# Allegro board QTPLUS_V2_1.brd
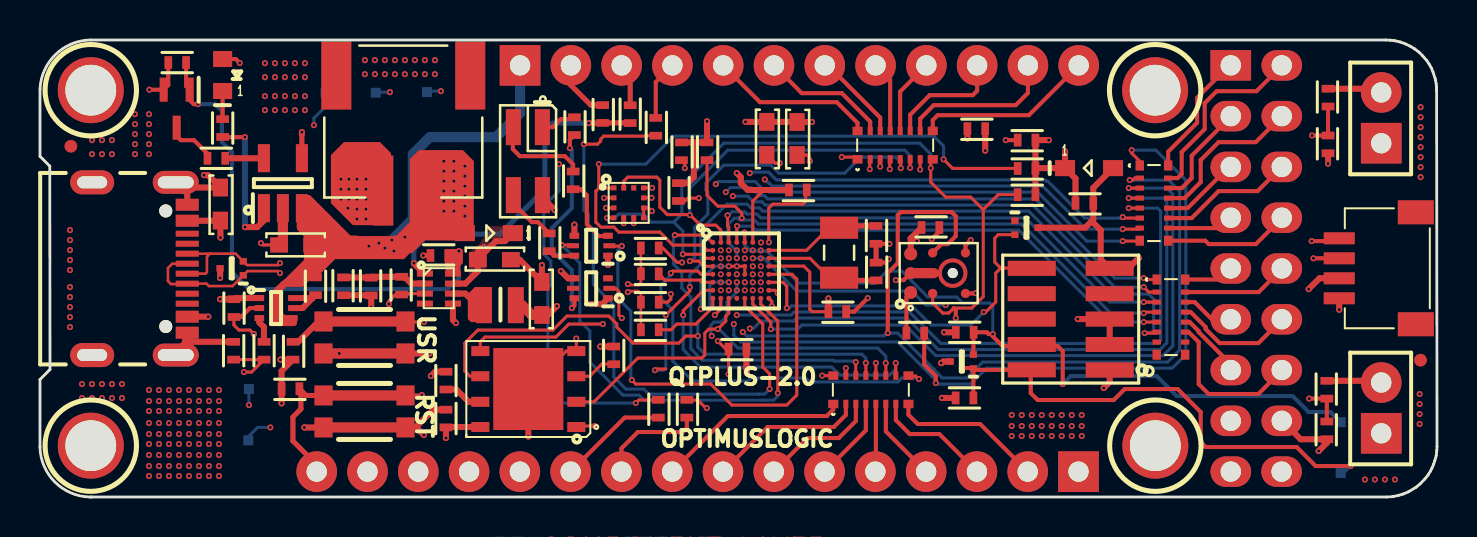
[diagram p0: board, top side]
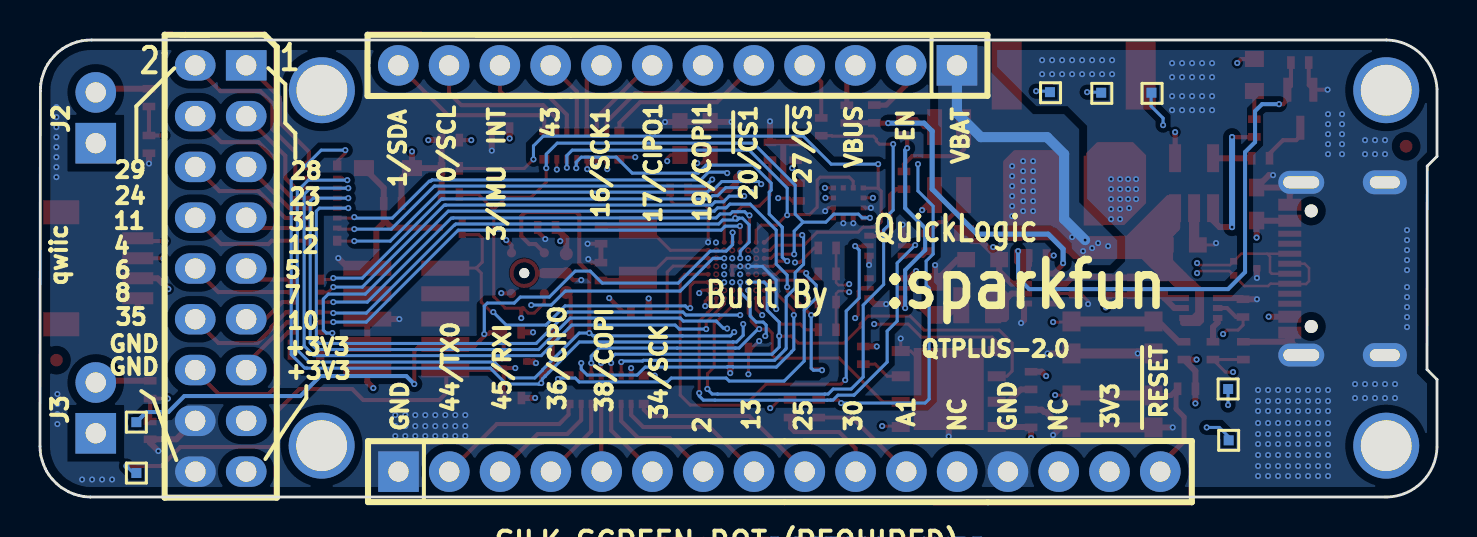
[diagram p1: board, bottom side, seen from below]

Outline 69.87 x 22.86 mm; copper layers: TOP, GND, IN1, IN2, PWR, BOTTOM. Coordinates in mm from the lower left corner of the outline.
Outline path: 0,20.4 0,17.04 0.49,16.55 0.5,6.38 0,5.88 0,2.5 arc(0.75,0.75) 2.5,0 67.35,0 67.67,0.02 67.94,0.08 68.18,0.15 68.44,0.26 68.81,0.48 69.04,0.67 69.26,0.9 69.42,1.1 69.54,1.29 69.61,1.43 69.7,1.64 69.76,1.82 69.83,2.07 69.86,2.33 69.87,2.54 69.85,20.31 69.84,20.5 69.83,20.66 69.78,20.92 69.66,21.29 69.59,21.45 69.48,21.65 69.35,21.84 69.15,22.07 68.97,22.25 68.76,22.41 68.53,22.55 68.3,22.66 68.03,22.76 67.77,22.82 67.53,22.85 67.28,22.86 2.53,22.86 arc(0.78,22.13) 0,20.4

## Design rules (mm)
net group USB_90: nets USB_D_N USB_D_P

## Placement (name value [footprint] x y rotation side)
AC1  LIS2DH12TR  [LGA50P200X200100-12N]  29.44 14.71 0 top
C1  4.7uF  [SMD_0603]  22.72 11.87 90 top
C2  100pF  [SMD_0402]  16.56 10.53 180 top
C3  22uF  [SMD_0603]  25.1 9.93 180 top
C4  4.7uF  [SMD_0603]  12.79 12.61 270 top
C5  1uF  [SMD_0402]  6.86 21.73 270 top
C6  0.1uF  [SMD_0402]  37.9 15.36 90 top
C7  0.1uF  [SMD_0402]  31.93 15.25 180 top
C8  4.7uF  [SMD_0603]  37.86 17.93 180 top
C9  4.7uF  [SMD_0603]  36.35 17.94 180 top
C10  0.1uF  [SMD_0402]  39.87 9.27 90 top
C11  0.1uF  [SMD_0402]  34.89 7.4 270 top
C12  12 pF  [SMD_0402]  41.82 11.28 180 top
C13  12 pF  [SMD_0402]  41.81 13.11 0 top
C14  0.1uF  [SMD_0402]  20.3 3.92 180 top
C15  4.7uF  [SMD_0603]  9.02 14.65 180 top
C16  0.1uF  [SMD_0402]  44.53 13.48 90 top
C17  0.1uF  [SMD_0402]  46.83 18.42 90 top
C18  0.1uF  [SMD_0402]  52.23 14.69 90 top
D1  PMEG4005EJ,115  [SOD-323_S]  22.45 13.2 180 top
D2  TPD2EUSB30DRTR  [TPD2EUSB_SOTFL35P100X50-3N]  9.59 11.44 180 top
D3  TPD2EUSB30DRTR  [TPD2EUSB_SOTFL35P100X50-3N]  49.34 13.47 0 top
D4  TPD2EUSB30DRTR  [TPD2EUSB_SOTFL35P100X50-3N]  46.11 6.78 180 top
D5  SD05C.TCT  [SOD-323_S]  52.47 16.45 0 top
FD1  fiducial  [FID_IN025X033]  1.54 17.55 0 top
FD2  fiducial  [FID_IN025X033]  69.05 6.84 0 top
H1  MH  [MH2_5MM]  55.77 20.35 0 top
H2  MH  [MH2_5MM]  2.54 20.35 0 top
H3  MH  [MH2_5MM]  2.54 2.57 0 top
H4  MH  [MH2_5MM]  55.78 2.57 0 top
IC1  TPS62821DLCR  [SON50P150X200X100-8N]  19.95 10.43 0 top
IC2  MCP73831T_2ACI_OT  [MCP73831T_SOT95P270X145-5N]  12.15 15.7 90 top
IC3  GD25Q16CWIGR  [SON127P500X600X80-9N-D]  24.42 5.4 180 top
IC4  2N7002PV_115  [SOTFL50P160X60-6N]  27.57 10.44 180 top
IC5  2N7002PV_115  [SOTFL50P160X60-6N]  27.57 12.57 180 top
J1  S2B-PH-SM4-TBLFSN  [JST_S2B-PH-SM4-TBLFSN]  18.17 18.33 180 top
J2  CON2  [CN2]  67.08 17.7 90 top
J3  CON2  [CN2]  67.08 3.19 90 top
J4  Qwiic_PRT-14417 / 4208  [QWIIC_PRT-14417_4208]  66.96 11.44 90 top
J5  USB4105-GF-A  [GCT_USB4105-GF-A]  2.61 11.42 270 top
J6  CON16  [CN16]  51.94 1.27 180 bottom
J7  62201021121  [CON_2X5_SMA_1P27]  51.55 8.9 180 top
J8  CON18A  [CN2X9D_FEMALE]  59.56 21.59 270 bottom
J9  CON12  [CN12]  24.01 21.59 0 bottom
L1  DFE201610E_R47M=P2  [DFE201610E-R47M_1285ASH1R0MP2]  23 9.6 0 top
LED1  APT1608SYCK  [LEDC1608X85N]  9.13 21.11 90 top
LED2  67-23/R6GHBHC-B06/2T  [P-LCC-4]  24.4 16.8 90 top
MIC_PORT  T POINT R  [0P75_HOLE]  45.65 11.2 0 top
Q1  NX3008CBKV_115  [NX3008CBKV_SOTFL50P160X60-6N]  11.81 9.45 0 top
Q2  2N7002KW  [SOT65P210X110-3N]  6.84 19.42 270 top
R1  1M5  [SMD_0402]  19.97 12.08 270 top
R2  453K  [SMD_0402]  15.19 10.54 0 top
R3  100K  [SMD_0402]  13.78 10.54 180 top
R4  100K  [SMD_0402]  18.09 10.57 180 top
R5  200K  [SMD_0402]  11.21 7.32 180 top
R6  10K  [SMD_0402]  9.7 9.45 0 top
R7  100K  [SMD_0402]  9.68 7.32 0 top
R8  1K5  [SMD_0402]  9.14 18.45 180 top
R9  4K7  [SMD_0402]  8.82 16.94 90 top
R10  10K  [SMD_0402]  64.42 19.98 180 top
R11  10K  [SMD_0402]  64.36 5.37 180 top
R12  10K  [SMD_0402]  64.42 17.64 180 top
R13  10K  [SMD_0402]  64.36 3.33 180 top
R14  10K  [SMD_0402]  33.36 17.3 0 top
R15  10K  [SMD_0402]  32.08 17.29 0 top
R16  1K5  [SMD_0402]  30.5 12.46 270 top
R17  22E  [SMD_0402]  30.5 11.16 270 top
R18  22E  [SMD_0402]  30.5 8.36 270 top
R19  1K5  [SMD_0402]  30.5 9.75 270 top
R20  10K  [SMD_0402]  20.3 5.82 180 top
R21  10K  [SMD_0402]  28.69 7.08 180 top
R22  10K  [SMD_0402]  12.53 5.41 270 top
R23  10K  [SMD_0402]  12.65 7.32 0 top
R24  100E  [SMD_0402]  26.66 15.84 0 top
R25  100E  [SMD_0402]  25.47 12.74 180 top
R26  220E  [SMD_0402]  26.73 18.55 0 top
R28  100E  [SMD_0402]  43.78 8.2 270 top
R29  4K7  [SMD_0402]  49.34 16.44 90 top
R30  10K  [SMD_0402]  49.34 17.85 90 top
R31  4K7  [SMD_0402]  49.34 15.12 90 top
R32  22E  [SMD_0402]  30.92 4.42 0 top
R33  22E  [SMD_0402]  32.35 4.42 0 top
R34  10K  [SMD_0402]  46.25 8.24 270 top
R35  10K  [SMD_0402]  46.24 4.96 270 top
R36  22E  [SMD_0402]  28.14 19.16 0 top
R38  22E  [SMD_0402]  30.8 18.52 0 top
R39  100K  [SMD_0402]  29.52 19.15 180 top
RN1  EXB_2HV220JV  [EXB2HV220JV]  55.71 14.7 270 top
RN2  EXB_2HV220JV  [EXB2HV220JV]  41.55 5.36 0 top
RN3  EXB_2HV220JV  [EXB2HV220JV]  56.56 9 270 top
RN4  EXB_2HV220JV  [EXB2HV220JV]  42.77 17.6 0 top
S1  KMR221GLFS  [KMR2_1]  16.23 7.98 0 top
S2  KMR221GLFS  [KMR2_1]  16.23 4.28 0 top
TP1  T POINT R  [TPS50]  19.36 20.25 180 bottom
TP2  T POINT R  [TPS50]  16.79 20.22 180 bottom
TP3  T POINT R  [TPS50]  14.28 20.22 180 bottom
TP4  T POINT R  [TPS50]  10.45 5.4 270 bottom
TP5  T POINT R  [TPS50]  65.05 1.2 180 bottom
TP6  T POINT R  [TPS50]  65.05 3.74 180 bottom
TP7  T POINT R  [TPS50]  10.42 2.83 270 bottom
U1  EOS_S3B_VBGA64  [VBGA64_3M5X3M5X0M6]  35.05 11.34 0 top
U2  -  [VM3011]  45.65 11.2 180 top
Y2  ABS07-32768KHZ-T  [XTAL_ABS07-32768KHZ-T]  39.97 12.22 90 top

## Library data of the parts
AC1 = LIS2DH12TR
C1-C18 = CAP NP
D1 = MBR0520LT3G
D2-D4 = TPD2EUSB30DRTR
D5 = ESD9B3_3ST5G
FD1 FD2 = T POINT R_1
H1-H4 = MH_0
IC1 = TPS62821DLCR
IC2 = MCP73831T_2ACI_OT
IC3 = GD25Q16CWIGR
IC4 IC5 = 2N7002PV_115
J1 = S2B-PH-SM4-TBLFSN
J2 J3 = CON2
J4 = 4208
J5 = USB4105-GF-A
J6 = CON16
J7 = 62201021121
J8 = CON18A_0
J9 = CON12
L1 = DFE201610E_R47M=P2
LED1 = APT1608SYCK
LED2 = CON4A
MIC_PORT TP1-TP7 = T POINT R
Q1 = NX3008CBKV_0
Q2 = 2N7002KW
R1-R26 R28-R36 R38 R39 = RESISTOR
RN1-RN4 = EXB_0
S1 S2 = KMR221GLFS
U1 = EOS_S3B_VBGA64
U2 = AAS-B1100-H01_0
Y2 = ABS07-32768KHZ-T

## Footprints (pads in the part's own frame, mm; a bottom-side part is the same pattern mirrored in y, then rotated)
0P75_HOLE
  round 0.5 hole 0.75 unplated: (0,0)
CN2
  rect 2.032x2.032 hole 1.016: 1(0,0)
  round 2.032 hole 1.016: 2(2.54,0)
CN2X9D_FEMALE
  rect 1.524x2.032 hole 1.016: 1(0,0)
  oval 1.524x2.032 hole 1.016: 2(0,-2.55) 3(2.54,0) 4(2.54,-2.55) 5(5.08,0) 6(5.08,-2.55) 7(7.62,0) 8(7.62,-2.55) 9(10.16,0) 10(10.16,-2.55) 11(12.7,0) 12(12.7,-2.55) 13(15.24,0) 14(15.24,-2.55) 15(17.78,0) 16(17.78,-2.55) 17(20.32,0) 18(20.32,-2.54)
CN12
  rect 2.032x2.032 hole 1.016: 1(0,0)
  round 2.032 hole 1.016: 2(2.54,0) 3(5.08,0) 4(7.62,0) 5(10.16,0) 6(12.7,0) 7(15.24,0) 8(17.78,0) 9(20.32,0) 10(22.86,0) 11(25.4,0) 12(27.94,0)
CN16
  rect 2.032x2.032 hole 1.016: 1(0,0)
  round 2.032 hole 1.016: 2(2.54,0) 3(5.08,0) 4(7.62,0) 5(10.16,0) 6(12.7,0) 7(15.24,0) 8(17.78,0) 9(20.32,0) 10(22.86,0) 11(25.4,0) 12(27.94,0) 13(30.48,0) 14(33.02,0) 15(35.56,0) 16(38.1,0)
CON_2X5_SMA_1P27
  rect 2.4x0.75 smd: 1(-1.95,2.54) 2(1.95,2.54) 3(-1.95,1.27) 4(1.95,1.27) 5(-1.95,0) 6(1.95,0) 7(-1.95,-1.27) 8(1.95,-1.27) 9(-1.95,-2.54) 10(1.95,-2.54)
DFE201610E-R47M_1285ASH1R0MP2
  rect 0.8x1.8 smd: 1(-0.8,0) 2(0.8,0)
EXB2HV220JV
  rect 0.5x0.42 smd: 1(-1.88,-0.71) 8(1.88,-0.71) 9(1.88,0.71) 16(-1.88,0.71)
  rect 0.25x0.42 smd: 2(-1.25,-0.71) 3(-0.75,-0.71) 4(-0.25,-0.71) 5(0.25,-0.71) 6(0.75,-0.71) 7(1.25,-0.71) 10(1.25,0.71) 11(0.75,0.71) 12(0.25,0.71) 13(-0.25,0.71) 14(-0.75,0.71) 15(-1.25,0.71)
FID_IN025X033
  round 0.635 smd: 1(0,0)
GCT_USB4105-GF-A
  round 0.65 hole 0.65 unplated: (-2.89,3.68) (2.89,3.68)
  rect 0.6x1.15 smd: A1/B12(-3.2,4.755) A4/B9(-2.4,4.755) B1/A12(3.2,4.755) B4/A9(2.4,4.755)
  rect 0.3x1.15 smd: A5(-1.25,4.755) A6(-0.25,4.755) A7(0.25,4.755) A8(1.25,4.755) B5(1.75,4.755) B6(0.75,4.755) B7(-0.75,4.755) B8(-1.75,4.755)
  oval 1.2x2.2 hole 0.6x1.5: G1(-4.32,0) G2(4.32,0)
  oval 1.15x2.3 hole 0.6x1.8: G3(-4.32,4.18) G4(4.32,4.18)
JST_S2B-PH-SM4-TBLFSN
  rect 1x3.5 smd: 1(1,3) 2(-1,3)
  rect 1.5x3.4 smd: S1(-3.35,-2.75) S2(3.35,-2.75)
KMR2_1
  rect 0.9x1 smd: 1(-2.05,-0.8) 2(2.05,-0.8) 3(2.05,0.8) 4(-2.05,0.8)
LEDC1608X85N
  rect 0.8x0.95 smd: 1(-0.8,0) 2(0.8,0)
LGA50P200X200100-12N
  rect 0.27x0.25 smd: 1(-0.75,0.75) 2(-0.75,0.25) 3(-0.75,-0.25) 4(-0.75,-0.75) 7(0.75,-0.75) 8(0.75,-0.25) 9(0.75,0.25) 10(0.75,0.75)
  rect 0.25x0.27 smd: 5(-0.25,-0.75) 6(0.25,-0.75) 11(0.25,0.75) 12(-0.25,0.75)
MCP73831T_SOT95P270X145-5N
  rect 1.4x0.6 smd: 1(-1.25,0.95) 2(-1.25,0) 3(-1.25,-0.95) 4(1.25,-0.95) 5(1.25,0.95)
MH2_5MM
  round 3.3 hole 2.54 unplated: (0,0)
NX3008CBKV_SOTFL50P160X60-6N
  rect 0.48x0.3 smd: 1(-0.84,0.5) 2(-0.84,0) 3(-0.84,-0.5) 4(0.84,-0.5) 5(0.84,0) 6(0.84,0.5)
P-LCC-4
  rect 1.8x0.75 smd: 1(1.7,-0.725) 2(1.7,0.725) 3(-1.7,0.725) 4(-1.7,-0.725)
QWIIC_PRT-14417_4208
  rect 0.6x1.55 smd: 1(-1.5,1.98) 2(-0.5,1.98) 3(0.5,1.98) 4(1.5,1.98)
  rect 1.2x1.8 smd: 5(-2.8,-1.85) 6(2.8,-1.85)
SMD_0402
  rect 0.635x0.381 smd: 1(0,0.445) 2(0,-0.445)
SMD_0603
  rect 0.762x0.889 smd: 1(0,0.826) 2(0,-0.826)
SOD-323_S
  rect 1x0.8 smd: 1(-1.2,0) 2(1.2,0)
SON50P150X200X100-8N
  rect 0.8x0.3 smd: 1(-0.7,0.75) 2(-0.7,0.25) 3(-0.7,-0.25) 4(-0.7,-0.75) 5(0.7,-0.75) 6(0.7,-0.25) 7(0.7,0.25) 8(0.7,0.75)
SON127P500X600X80-9N-D
  rect 0.9x0.5 smd: 1(-2.4,1.9) 2(-2.4,0.64) 3(-2.4,-0.64) 4(-2.4,-1.9) 5(2.4,-1.9) 6(2.4,-0.64) 7(2.4,0.64) 8(2.4,1.9)
  rect 3.5x4.1 smd: 9(0,0)
SOT65P210X110-3N
  rect 1.2x0.4 smd: 1(-0.95,0.65) 2(-0.95,-0.65) 3(0.95,0)
SOTFL50P160X60-6N
  rect 0.48x0.3 smd: 1(-0.84,0.5) 3(-0.84,-0.5) 4(0.84,-0.5) 6(0.84,0.5)
  rect 0.6x0.25 smd: 2(-0.91,0) 5(0.91,0)
TPD2EUSB_SOTFL35P100X50-3N
  rect 0.36x0.33 smd: 1(-0.58,0.35) 2(-0.58,-0.35) 3(0.58,0)
TPS50
  rect 0.5x0.5 smd: 1(0,0)
VBGA64_3M5X3M5X0M6
  round 0.25 smd: A1(-1.4,1.4) A2(-1,1.4) A3(-0.6,1.4) A4(-0.2,1.4) A5(0.2,1.4) A6(0.6,1.4) A7(1,1.4) A8(1.4,1.4) B1(-1.4,1) B2(-1,1) B3(-0.6,1) B4(-0.2,1) B5(0.2,1) B6(0.6,1) B7(1,1) B8(1.4,1) C1(-1.4,0.6) C2(-1,0.6) C3(-0.6,0.6) C4(-0.2,0.6) C5(0.2,0.6) C6(0.6,0.6) C7(1,0.6) C8(1.4,0.6) D1(-1.4,0.2) D2(-1,0.2) D3(-0.6,0.2) D4(-0.2,0.2) D5(0.2,0.2) D6(0.6,0.2) D7(1,0.2) D8(1.4,0.2) E1(-1.4,-0.2) E2(-1,-0.2) E3(-0.6,-0.2) E4(-0.2,-0.2) E5(0.2,-0.2) E6(0.6,-0.2) E7(1,-0.2) E8(1.4,-0.2) F1(-1.4,-0.6) F2(-1,-0.6) F3(-0.6,-0.6) F4(-0.2,-0.6) F5(0.2,-0.6) F6(0.6,-0.6) F7(1,-0.6) F8(1.4,-0.6) G1(-1.4,-1) G2(-1,-1) G3(-0.6,-1) G4(-0.2,-1) G5(0.2,-1) G6(0.6,-1) G7(1,-1) G8(1.4,-1) H1(-1.4,-1.4) H2(-1,-1.4) H3(-0.6,-1.4) H4(-0.2,-1.4) H5(0.2,-1.4) H6(0.6,-1.4) H7(1,-1.4) H8(1.4,-1.4)
VM3011
  round 0.65 smd: 1(2.1,0.965) 6(2.1,-0.965)
  round 0.46 smd: 2(1,1.015) 3(-0.64,1.015) 4(-0.64,-1.015) 5(1,-1.015)
  round 0.6 smd: 7(2.1,0)
  round 0.1 smd: 8(0.65,0)
XTAL_ABS07-32768KHZ-T
  rect 1.1x1.9 smd: 1(-1.25,0) 2(1.25,0)

## Nets
3V3_EN: IC1.1(EN) R36.2 R39.1
+3V3: AC1.2(CS) AC1.9(VDD) AC1.10(VDD_IO) C2.1 C3.1 C6.1 C7.1 C10.1 C11.1 C14.1 C16.1 C17.1 C18.1 D5.1(K) IC3.8(VCC) J2.1 J3.1 J4.2 J6.15 J7.1 J8.15 J8.17 L1.2 LED2.4 R2.2 R20.2 R21.2 R22.2 R23.2 R29.2 R30.2 R31.2 R34.2 R35.2 U1.A6(LDO_VIN) U1.C2(VCCIOA) U1.D8(AVDD) U1.E4(VCCIOB1) U1.E6(VCCIOB2) U2.6(VDD)
+VBAT: C4.1 D1.2(A) IC2.3(VBAT) J1.2 J9.1 Q1.4(S2) R3.2
+VBUS: C1.1 C15.1 D1.1(K) IC1.7(VIN) IC2.4(VDD) J5.A4/B9(VBUS) J5.B4/A9(VBUS__1) J9.3 LED1.2(A) R1.2 R39.2
GND: AC1.3(SDO/SAO) AC1.5(RES) AC1.6(GND) AC1.7(GND__1) AC1.8(GND__2) C1.2 C3.2 C4.2 C5.2 C6.2 C7.2 C8.2 C9.2 C10.2 C11.2 C12.2 C13.2 C14.2 C15.2 C16.2 C17.2 C18.2 D2.3(GND) D3.3(GND) D4.3(GND) D5.2(A) IC1.3(AGND) IC1.5(PGND) IC2.2(VSS) IC3.4(VSS) IC3.9(PAD) IC4.1(S1) IC4.4(S2) IC5.1(S1) IC5.4(S2) J1.1 J4.1 J5.A1/B12(GND) J5.B1/A12(GND__1) J5.G1(GND__2) J5.G2(GND__3) J5.G3(GND__4) J5.G4(GND__5) J6.1 J6.13 J7.3 J7.5 J7.9 J8.16 J8.18 Q1.1(S1) Q2.2(S) R4.1 R6.1 R7.1 R12.1 R13.1 R14.1 R15.1 S1.1 S1.2 S2.1 S2.2 U1.A8(AGND) U1.D3(GND1) U1.D4(GND2) U1.D5(GND3) U1.E5(STM) U1.G3(VPP_FSOURCE) U2.7(SELECT) U2.8(GND)
ADC0: R5.1 R7.2 U1.A7(ADC0)
ADC0_EN: Q1.2(G1) R6.2 U1.F6(GPIO26)
ADC1: R32.1 U1.C7(ADC1)
HEADER_P6: RN4.5 U1.D1(GPIO43)
HEADER_RX: RN2.10 U1.G1(GPIO45)
HEADER_TX: RN2.9 U1.E1(GPIO44)
I2C_SCL: AC1.1(SCL/SPC) J4.4 R29.1 RN4.7 U1.B1(GPIO0) U2.4(SCL)
I2C_SDA: AC1.4(SDA/SDI/SDO) J4.3 R31.1 RN4.8 U1.C1(GPIO1) U2.2(SDA)
I2S_CLK: RN1.5 U1.G4(GPIO31)
I2S_DOUT: RN1.4 U1.G6(GPIO24)
I2S_WCLK: RN1.3 U1.H6(GPIO23)
IMU_INT: AC1.12(INT1) R30.1 RN4.6 U1.A2(GPIO3)
J8.1: J8.1 RN1.16
J8.2: J8.2 RN1.15
J8.3: J8.3 RN1.14
J8.4: J8.4 RN1.13
J8.5: J8.5 RN1.12
J8.6: J8.6 RN1.11
J8.7: J8.7 RN1.10
J8.8: J8.8 RN1.9
J8.9: J8.9 RN3.16
J8.10: J8.10 RN3.15
J8.11: J8.11 RN3.14
J8.12: J8.12 RN3.13
J8.13: J8.13 RN3.12
J8.14: J8.14 RN3.11
LED_B: IC5.6(D1) R25.1
LED_G: IC5.3(D2) R24.2
LED_R: IC4.6(D1) R26.2
PDM_CKO: RN1.2 U1.F5(GPIO29) U2.5(CLOCK)
PDM_DATA: R28.1 RN1.1 U1.G5(GPIO28)
PG: C5.1 IC1.8(PG) Q2.1(G) R1.1
Q_LED_B: IC5.2(G1) U1.E8(GPIO18)
Q_LED_G: IC5.5(G2) U1.H7(GPIO21)
Q_LED_R: IC4.2(G1) U1.G7(GPIO22)
S3IO_2: RN2.14 U1.A1(GPIO2)
S3IO_4: RN1.8 U1.B2(GPIO4)
S3IO_5: RN3.1 U1.C3(GPIO5)
S3IO_7: RN3.3 U1.A3(GPIO7)
S3IO_8: R14.2 RN3.4 U1.C4(GPIO8)
S3IO_9: R15.2 TP3.1(TP) U1.B4(GPIO9)
S3IO_10: RN3.5 U1.A4(GPIO10)
S3IO_11: RN1.6 U1.C5(GPIO11)
S3IO_12: RN1.7 U1.B5(GPIO12) U2.3(INT)
S3IO_13: RN2.15 U1.D6(GPIO13)
S3IO_25: RN2.16 U1.F7(GPIO25)
S3IO_30: R33.1 U1.F4(GPIO30)
S3IO_35: RN3.6 TP4.1(TP) U1.F2(GPIO35)
SPI_MST_CLK: IC3.6(SCLK) RN2.13 U1.F3(GPIO34)
SPI_MST_CS2: R38.2 U1.H5(GPIO27)
SPI_MST_MISO: IC3.2(SO__IO1_) RN2.11 U1.H3(GPIO36)
SPI_MST_MOSI: IC3.5(SI__IO0_) RN2.12 U1.E2(GPIO38)
SPI_MST_SS: IC3.1(CS#) TP7.1(TP) U1.H2(GPIO39)
SPI_SLV_CLK: RN4.4 U1.E7(GPIO16)
SPI_SLV_CSN: R10.1 R12.2 RN4.1 U1.G8(GPIO20)
SPI_SLV_MISO: RN4.3 U1.D7(GPIO17)
SPI_SLV_MOSI: R11.1 R13.2 RN4.2 U1.H8(GPIO19)
SWD_CLK: D4.2(DM) J7.4 R34.1 TP6.1(TP) U1.A5(GPIO14)
SWD_IO: D4.1(DP) J7.2 R35.1 TP5.1(TP) U1.C6(GPIO15)
SYS_RST: D3.2(DM) J6.16 J7.10 R22.1 S2.3 S2.4 U1.F8(SYS_RSTN)
USB_D_N: D2.2(DM) J5.A7(DN1) J5.B7(DN2) R16.2 R17.2
USB_D_P: D2.1(DP) J5.A6(DP1) J5.B6(DP2) R18.2 R19.2
USR_BUTTON: R23.1 RN3.2 S1.3 S1.4 U1.B3(GPIO6)
N2984124: IC1.6(SW) L1.1
N2984508: C2.2 IC1.2(FB) R2.1 R4.2
N2984777: Q2.3(D) R9.1
N2984894: IC2.5(PROG) R9.2
N2985185: IC2.1(STAT) R8.1
N2985197: LED1.1(K) R8.2
N2985457: Q1.5(G2) Q1.6(D1) R3.1
N2985636: Q1.3(D2) R5.2
N2988172: IC3.3(WP#__IO2_) R21.1
N2988191: IC3.7(HOLD#__IO3_) R20.1
N3049346: C12.1 U1.C8(OSCO) Y2.1
N3049374: C13.1 U1.B8(OSCI) Y2.2
N3056718: J2.2 R10.2
N3056722: J3.2 R11.2
N3059207: R19.1 U1.G2(GPIO37)
N3059301: R16.1 U1.D2(GPIO40)
N3059461: R17.1 U1.F1(GPIO41)
N3059478: R18.1 U1.H1(GPIO42)
N3059975: C8.1 TP1.1(TP) U1.B7(LDO_VOUT1)
N3059993: C9.1 TP2.1(TP) U1.B6(LDO_VOUT2)
N3061302: LED2.2 R24.1
N3061308: LED2.1 R26.1
N3064576: R28.2 U2.1(DATA)
N3067899: J6.11 R32.2
N3067935: J6.10 R33.2
N3068086: J6.9 RN2.1
N3068088: J6.8 RN2.2
N3068090: J6.7 RN2.3
N3068092: J6.6 RN2.4
N3068094: J6.5 RN2.5
N3068096: J6.4 RN2.6
N3068098: J6.3 RN2.7
N3068100: J6.2 RN2.8
N3070123: J9.12 RN4.9
N3070397: J9.4 R38.1
N3070527: J9.5 RN4.16
N3070529: J9.11 RN4.10
N3070531: J9.10 RN4.11
N3070533: J9.9 RN4.12
N3070535: J9.8 RN4.13
N3070537: J9.7 RN4.14
N3070539: J9.6 RN4.15
N3103817: LED2.3 R25.2
N3119865: J9.2 R36.1

Pads without a net: AC1 11; D3 1; FD1 1; FD2 1; IC1 4; IC4 3 5; J1 S1 S2; J4 5 6; J5 A5 A8 B5 B8; J6 12 14; J7 6 7 8; RN3 7 8 9 10; U1 E3 H4

## Via types
v1: diameter 0.305, hole 0.152, TOP to BOTTOM, 427 vias
v2: diameter 0.305, hole 0.152, TOP to IN1, 19 vias

## Routing (per net, layer and track width the routed paths; a pad name or vN(x,y) marks a point on that pad's centre or on a via; arc(x,y) is an arc through that point)
3V3_EN: length 16.6
  TOP w0.254: IC1.1 19.17,11.18 18.7,11.65 v1(18.7,11.7) ; v1(27.45,18.7) 28.13,18.7 R36.2 29.51,18.71 R39.1
  BOTTOM w0.254: v1(27.45,18.7) 25.65,18.7 25.25,18.3 25.25,15.4 23,13.15 19.45,13.15 18.7,12.4 v1(18.7,11.7)
+3V3: length 46.1
  TOP w0.152: 36.21,15.36 35.65,14.8 U1.A6 ; C7.1 32.26,14.81 32.4,14.95 v1(32.95,14.95) ; C10.1 38.63,9.27 38.5,9.4 38.5,11.25 38.2,11.55 36.46,11.55 U1.D8 ; AC1.9 v1(30.59,14.96) ; AC1.10 v1(30.61,15.46) ; AC1.2 v1(28.21,14.96)
  TOP w0.3: C6.1 35.39,15.36 35.05,15.7 35.05,16 v1(34.85,16.2) ; v1(12.08,4.68) R22.2 12.08,6.3 R23.2 v1(12.03,6.87) ; R21.2 v1(28.02,7.53) ; C10.1 v1(39.43,9.93) ; R2.2 16.55,10.09 C2.1 v1(16.56,9.49) ; v1(53.2,5.45) 53.5,5.75 J7.1 ; C11.1 35.33,6.42 35.35,6.4 v1(35.35,6.2) ; U2.6 43.55,12.94 ; 43.55,12.94 43.71,12.94 v1(43.85,12.8) ; 43.55,12.94 C16.1 ; R34.2 v1(45.21,8.24) ; C18.1 51.79,15.93 D5.1 ; R20.2 19.77,6.27 v1(19.55,6.05) ; v1(25.85,9.55) 25.41,9.11 C3.1 ; v1(20.3,2.95) C14.1 20.32,3.5 IC3.8 ; D5.1 v1(51.27,17.28) ; D5.1 49.8,16.45 R29.2 ; v1(50.45,17.85) R30.2 R29.2 ; LED2.4 25.12,14.97 v1(25.75,14.35) ; C17.1 v1(46.38,17.93) ; R35.2 v1(45.11,4.96) ; v1(63.45,10.4) 63.99,10.94 J4.2 ; R29.2 R31.2
  TOP w0.505: L1.2 24.1,9.6 24.59,9.11 C3.1
  IN1 w0.152: v1(32.95,14.95) 32.95,12.65 33.66,11.94 v2(34.05,11.94)
  PWR w0.3: v1(34.85,11.14) v1(35.65,11.14)
+VBAT: length 21.3
  TOP w0.3: Q1.4 12.1,8.95 11.89,9.16 11.89,10.39 11.94,10.39 12.3,10.75 12.8,10.75 13.05,11 13.77,11 R3.2 13.78,12.44 C4.1
  TOP w0.508: IC2.3 13.1,13.5 13.61,12.99 C4.1
  BOTTOM w0.508: J9.1 24.01,19.2 22.81,18 19.5,18 18.65,17.15 18.65,13.9 v1(17.6,12.85)
  vias: v1(16.45,12.55) v1(16.95,12.7) v1(17.25,12.45) v1(17.7,12.3) v1(18.25,13) v1(20.2,16.8) v1(20.2,16.3) v1(20.2,15.8) v1(20.2,15.3) v1(20.2,14.8) v1(20.2,14.3) v1(20.7,16.8) v1(20.7,16.3) v1(20.7,15.8) v1(20.7,15.3) v1(20.7,14.8) v1(20.7,14.3) v1(21.25,16.55) v1(21.25,16.05) v1(21.25,15.55) v1(21.25,15.05) v1(21.25,14.55) v1(21.25,14.05)
+VBUS: length 13.5
  TOP w0.203: v1(9.99,21.71) 9.79,21.91 LED1.2
  TOP w0.254: v1(22.2,12.5) 22.15,12.45 22.05,12.45 21.9,12.3 21.9,11.9 ; J9.3 29.52,21.16 R39.2 ; R1.2 v1(19.17,12.08) ; 13.1,18.15 IC2.4
  TOP w0.3: D1.1 23.25,12.8 22.8,12.8 21.9,11.9 C1.1 21.9,11.3 21.28,10.68 IC1.7 ; v1(13.1,18.25) 13.1,18.15 ; v1(9.02,12.98) C15.1 9.02,13.82 J5.A4/B9 ; J5.B4/A9 v1(8.42,9.02)
GND: length 96.2
  TOP w0.152: U1.A8 36.45,14.45 36.65,14.65 38.15,14.65 38.3,14.8 38.3,15.31 C6.2 ; IC3.9 26.32,7.3 26.82,7.3 v1(26.82,7.93) ; v1(34.45,11.54) v1(34.85,11.54) U1.D5 U1.E5 ; v1(33.9,7.8) 34.3,7.4 C11.2 v1(34.44,6.14) ; AC1.3 v1(28.31,14.46) ; AC1.6 v1(29.69,13.69) ; v1(17.45,9.65) 17.45,9.8 17.78,10.13 R4.1 18.38,10.13 18.43,10.18 IC1.3 ; J1.1 16.37,15.33 v1(16.3,15.4) ; v1(30.6,14.3) 30.44,14.46 AC1.8 AC1.7 ; v1(11.05,12.7) 11.14,12.61 C4.2 ; AC1.5 v1(29.19,13.69)
  TOP w0.17: 44.7,11.2 U2.8
  TOP w0.203: U2.7 43.2,10.85 v1(42.8,10.85) ; v1(5.47,20.37) Q2.2 6.42,20.61 C5.2 ; C10.2 40.72,9.27 v1(41.4,9.95) ; C12.2 42.27,11.72 v1(42.45,11.9) ; v1(44.6,12.9) 44.98,13.28 C16.2 ; C13.2 v1(42.48,12.67)
  TOP w0.254: C13.2 41.82,12.66 C12.2
  TOP w0.3: v1(35.28,18.77) C9.2 37.86,18.77 C8.2 v1(38.61,18.76) ; 62.13,3.81 63.05,2.89 R13.1 64.36,2.71 v1(63.95,2.3) ; J5.G3 7.05,15.48 ; 7.05,15.48 7.37,15.16 J5.A1/B12 ; 7.05,15.48 C15.2 8.4,16.1 v1(8.2,16.1) ; v1(51.9,8.9) J7.5 J7.3 ; Q1.1 9.76,9.95 R6.1 v1(9.01,9.89) ; IC4.1 28.12,9.65 v1(27.55,9.65) ; 52.6,13.8 53.05,13.35 53.05,11.89 J7.9 54.44,11.44 v1(54.95,11.95) ; 52.6,13.8 52.27,13.47 D3.3 ; 52.6,13.8 52.68,13.88 C18.2 52.68,15.46 D5.2 ; S2.2 18.78,3.48 ; 18.78,3.48 19.55,4.25 19.65,4.25 19.77,4.37 C14.2 ; 18.78,3.48 18.82,3.48 v1(19.2,3.1) ; S1.2 v1(19.48,7.18) ; IC5.4 v1(26.73,13.62) ; v1(25.1,11.6) C3.2 23.99,11.87 23.55,11.87 ; D4.3 45.18,6.78 45.1,6.7 v1(45.07,6.7) ; IC1.5 20.65,8.85 v1(20.8,8.7) ; C17.2 v1(47.27,17.33) ; v1(33.36,18.79) R14.1 33.36,17.74 32.7,17.74 ; 32.7,17.74 R15.1 ; 32.7,17.74 32.7,16 32.4,15.7 C7.2 ; D2.3 v1(9.01,10.96) ; R7.1 7.45,7.76 7.37,7.67 ; IC4.4 26.41,10.94 v1(26.05,11.3) ; R12.1 v1(64.42,16.68) ; J4.1 v1(64.98,9.37) ; IC3.9 v1(24.42,3.03) ; IC5.1 v1(28.41,11.61) ; S2.1 v1(13.22,3.48)
  TOP w0.505: S1.1 v1(14.97,7.18) S1.2 ; S2.2 S2.1
  TOP w0.508: J5.G4 7.37,7.67 J5.B1/A12 ; IC2.2 12.15,12.8 C4.2 ; U2.7 44.7,11.2
  GND w0.152: v1(34.45,10.34) 34.45,10.1 34.35,10
  IN2 w0.152: J5.G1 J5.G3
  BOTTOM w0.152: v1(34.45,11.54) 33.74,11.54 33.05,10.85 v1(33.05,9.4)
  vias: v1(1.5,13.35) v1(1.5,12.85) v1(1.5,12.35) v1(1.5,11.85) v1(1.5,11.35) v1(1.5,10.5) v1(1.5,10) v1(1.5,9.5) v1(1.5,9) v1(1.5,8.5) v1(2.1,5.65) v1(2.1,4.95) v1(2.6,17.85) v1(2.6,17.15) v1(2.6,5.65) v1(2.6,4.95) v1(3.1,17.85) v1(3.1,17.15) v1(3.1,5.65) v1(3.1,4.95) v1(3.6,17.85) v1(3.6,17.15) v1(3.6,5.65) v1(3.6,4.95) v1(4.1,5.65) v1(4.1,4.95) v1(4.75,19.15) v1(4.75,18.65) v1(4.75,18.15) v1(4.75,17.65) v1(4.75,17.15) v1(5.45,19.15) v1(5.45,18.65) v1(5.45,18.15) v1(5.45,17.65) v1(5.45,17.15) v1(5.45,5.35) v1(5.45,4.8) v1(5.45,4.3) v1(5.45,3.7) v1(5.45,3.15) v1(5.45,2.65) v1(5.45,2.1) v1(5.45,1.55) v1(5.45,1.05) v1(5.95,5.35) v1(5.95,4.8) v1(5.95,4.3) v1(5.95,3.7) v1(5.95,3.15) v1(5.95,2.65) v1(5.95,2.1) v1(5.95,1.55) v1(5.95,1.05) v1(6.45,5.35) v1(6.45,4.8) v1(6.45,4.3) v1(6.45,3.7) v1(6.45,3.15) v1(6.45,2.65) v1(6.45,2.1) v1(6.45,1.55) v1(6.45,1.05) v1(6.95,5.35) v1(6.95,4.8) v1(6.95,4.3) v1(6.95,3.7) v1(6.95,3.15) v1(6.95,2.65) v1(6.95,2.1) v1(6.95,1.55) v1(6.95,1.05) v1(7.45,5.35) v1(7.45,4.8) v1(7.45,4.3) v1(7.45,3.7) v1(7.45,3.15) v1(7.45,2.65) v1(7.45,2.1) v1(7.45,1.55) v1(7.45,1.05) v1(7.95,5.35) v1(7.95,4.8) v1(7.95,4.3) v1(7.95,3.7) v1(7.95,3.15) v1(7.95,2.65) v1(7.95,2.1) v1(7.95,1.55) v1(7.95,1.05) v1(8.45,5.35) v1(8.45,4.8) v1(8.45,4.3) v1(8.45,3.7) v1(8.45,3.15) v1(8.45,2.65) v1(8.45,2.1) v1(8.45,1.55) v1(8.45,1.05) v1(8.95,5.35) v1(8.95,4.8) v1(8.95,4.3) v1(8.95,3.7) v1(8.95,3.15) v1(8.95,2.65) v1(8.95,2.1) v1(8.95,1.55) v1(8.95,1.05) v1(11.25,21.7) v1(11.25,21) v1(11.25,20.05) v1(11.25,19.35) v1(11.75,21.7) v1(11.75,21) v1(11.75,20.05) v1(11.75,19.35) v1(12.25,21.7) v1(12.25,21) v1(12.25,20.05) v1(12.25,19.35) v1(12.75,21.7) v1(12.75,21) v1(12.75,20.05) v1(12.75,19.35) v1(13.25,21.7) v1(13.25,21) v1(13.25,20.05) v1(13.25,19.35) v1(15.05,15.9) v1(15.05,15.4) v1(15.05,14.9) v1(15.45,15.9) v1(15.45,15.4) v1(15.45,14.9) v1(15.4,14.45) v1(15.85,15.9) v1(15.85,15.4) v1(15.85,14.9) v1(15.85,14.4) v1(15.85,13.9) v1(16.25,21.85) v1(16.25,21.15) v1(16.3,15.9) v1(16.3,14.9) v1(16.3,14.4) v1(16.3,13.9) v1(16.75,21.85) v1(16.75,21.15) v1(17.25,21.85) v1(17.25,21.15) v1(17.75,21.85) v1(17.75,21.15) v1(18.25,21.85) v1(18.25,21.15) v1(18.75,21.85) v1(18.75,21.15) v1(19.25,21.85) v1(19.25,21.15) v1(19.75,21.85) v1(19.75,21.15) v1(36.46,12.74) v1(48.6,4.1) v1(48.6,3.55) v1(48.6,3.05) v1(49.1,4.1) v1(49.1,3.55) v1(49.1,3.05) v1(49.6,4.1) v1(49.6,3.55) v1(49.6,3.05) v1(50.1,4.1) v1(50.1,3.55) v1(50.1,3.05) v1(50.6,4.1) v1(50.6,3.55) v1(50.6,3.05) v1(51.1,4.1) v1(51.1,3.55) v1(51.1,3.05) v1(51.6,4.1) v1(51.6,3.55) v1(51.6,3.05) v1(52.1,4.1) v1(52.1,3.55) v1(52.1,3.05) v1(66.26,0.87) v1(66.76,0.87) v1(67.26,0.87) v1(67.76,0.87) v1(69.05,19.5) v1(69.05,19) v1(69.05,18.5) v1(69.05,18) v1(69.05,17.5) v1(69.05,17) v1(69.05,16.5) v1(69.05,16) v1(69,5.15) v1(69,4.65) v1(69,4.15) v1(69,3.65)
ADC0: length 45
  TOP w0.152: R7.2 R5.1 10.58,6.25 v1(10.2,6.25)
  IN2 w0.152: v1(10.2,6.25) 9.75,6.7 9.75,15.1 12.05,17.4 21.6,17.4 23.15,15.85 32.9,15.85 33.95,16.9 36.25,16.9 36.7,16.45 36.7,15.25 36.05,14.6 U1.A7 v1(36.06,12.73)
ADC0_EN: length 38.9
  TOP w0.152: R6.2 9.7,9 9.7,8.6 9.95,8.35 10.5,8.35 v1(10.7,8.15)
  TOP w0.203: Q1.2 10.5,9.45 10.05,9 R6.2
  IN2 w0.152: v1(10.7,8.15) 11.25,8.15 11.4,8 11.4,4.55 11.9,4.05 25.2,4.05 26.1,3.15 33.25,3.15 33.85,3.75 33.85,6.6 34.35,7.1 34.85,7.1 36,8.25 36,8.65 35.65,9 v1(35.65,10.74)
ADC1: length 39.8
  TOP w0.152: R32.1 30.91,4.85 29.95,4.85 v1(29.8,4.7)
  IN1 w0.152: v1(25.96,16.65) 25.96,17.76 26.45,18.25 28.05,18.25 28.5,17.8 38.45,17.8 39,17.25 39,16.5 37.65,15.15 37.65,12.55 37.04,11.94 v2(36.05,11.94)
  BOTTOM w0.152: v1(25.96,16.65) 25.96,15.31 25.2,14.55 25.2,12.15 25.55,11.8 25.55,10.6 25.4,10.45 25.4,4.9 25.6,4.7 v1(29.8,4.7)
HEADER_P6: length 17.1
  TOP w0.152: U1.D1 33.21,11.54 32.95,11.8 v1(32.5,11.8) ; RN4.5 43.05,16.86 v1(43.05,16.45)
  BOTTOM w0.152: v1(43.05,16.45) 43.05,16.75 42.8,17 41.05,17 40.25,16.2 36.95,16.2 36.55,16.6 34.2,16.6 33.3,15.7 33.3,15.35 33.4,15.25 33.4,14.15 32.75,13.5 32.75,13.48 32.75,13.48 32.75,12 32.55,11.8 v1(32.5,11.8)
HEADER_RX: length 16.1
  TOP w0.152: RN2.10 42.8,6.08 v1(42.8,6.7) ; U1.G1 33.19,10.34 32.17,9.32 v1(32.17,9.1)
  BOTTOM w0.152: v1(32.17,9.1) 32.17,7.38 32.29,7.26 32.29,7.25 33.04,6.5 35.2,6.5 35.22,6.52 35.48,6.52 35.5,6.5 39.6,6.5 40,6.1 42.5,6.1 42.8,6.4 v1(42.8,6.7)
HEADER_TX: length 20.6
  TOP w0.152: U1.E1 33.06,11.14 32.9,11.3 31.65,11.3 v1(31.55,11.2) ; RN2.9 43.46,6.05 43.8,6.05 43.95,5.9 v1(43.96,5.9)
  BOTTOM w0.152: v1(31.55,11.2) 31.55,11.1 31.05,10.6 31.05,9.95 31.65,9.35 31.65,6.8 32.65,5.8 35.4,5.8 35.55,5.95 38.3,5.95 38.5,5.75 42.9,5.75 43.1,5.95 43.91,5.95 v1(43.96,5.9)
I2C_SCL: length 59.6
  TOP w0.152: AC1.1 28.68,15.45 27.95,15.45 ; v1(27.95,16.65) 27.95,15.45 27.95,15.45 ; 27.95,15.45 27.8,15.3 27.8,13.75 28.05,13.5 28.7,13.5 28.95,13.25 31,13.25 31.65,12.6 33.1,12.6 33.36,12.34 U1.B1 ; R29.1 45.64,16.44 v1(45.19,16.89) ; RN4.7 v1(44.02,16.38)
  TOP w0.203: U2.4 46.29,12.59 v1(46.55,12.85) ; v1(63.6,12.8) 64.84,12.8 J4.4
  IN1 w0.152: v1(45.19,16.89) 45.25,16.83 45.25,16 ; 45.25,16 45.1,15.85 44.25,15.85 44.02,16.08 v1(44.02,16.38) ; 45.25,16 45.45,15.8 46.2,15.8 46.55,15.45 v1(46.55,12.85) 46.9,12.85 47.35,12.4 57.45,12.4 57.75,12.7 63.5,12.7 v1(63.6,12.8)
  BOTTOM w0.152: v1(27.95,16.65) 30.3,16.65 31.7,18.05 44.7,18.05 45.19,17.56 v1(45.19,16.89)
I2C_SDA: length 63.1
  TOP w0.152: 47.17,14.38 47.92,15.12 R31.1 ; 47.17,14.38 46.55,15 45.3,15 44.55,15.75 v1(44.55,16.45) 44.55,16.79 RN4.8 ; 47.17,14.38 47.17,10.03 46.6,9.45 45.7,9.45 45.45,9.2 45.15,9.2 44.65,9.7 44.65,10.18 U2.2 ; AC1.4 v1(28.36,13.96) ; U1.C1 33.31,11.94 33.11,12.14 v1(32.15,12.14)
  TOP w0.203: 45.7,9.45 45.8,9.35 v1(45.8,8.95) ; J4.3 v1(63.69,11.94)
  IN2 w0.152: v1(63.69,11.94) 63.9,11.73 63.9,8.35 63.1,7.55 46.05,7.55 45.8,7.8 v1(45.8,8.95)
  BOTTOM w0.152: 31.7,13.75 32.1,14.15 32.1,15.6 34.2,17.7 44,17.7 44.55,17.15 v1(44.55,16.45) ; 31.7,13.75 30.56,13.75 30.16,14.15 28.94,14.15 28.75,13.96 v1(28.36,13.96) ; 31.7,13.75 32.15,13.3 v1(32.15,12.14)
I2S_CLK: length 31.9
  TOP w0.152: RN1.5 55,14.45 v1(54.45,14.45)
  IN1 w0.152: v1(34.85,9.1) v2(34.85,10.34)
  BOTTOM w0.152: v1(34.85,9.1) 35.92,9.1 35.92,9.1 37.57,9.1 37.72,9.25 43.48,9.25 45.05,7.68 55.9,7.68 56.05,7.83 56.05,14.3 55.9,14.45 v1(54.45,14.45)
I2S_DOUT: length 33.4
  TOP w0.152: v1(54.45,14.95) 54.45,14.95 RN1.4
  IN1 w0.152: v1(35.5,8.43) 35.5,8.45 35.65,8.6 v2(35.65,10.34)
  BOTTOM w0.152: v1(35.5,8.43) 35.53,8.45 35.7,8.45 36.05,8.8 37.7,8.8 37.85,8.95 43.35,8.95 44.93,7.38 56.02,7.38 56.35,7.71 56.35,14.8 56.2,14.95 v1(54.45,14.95)
I2S_WCLK: length 33.4
  TOP w0.152: U1.H6 35.65,9.65 36.55,8.75 v1(36.55,8.4) ; RN1.3 55,15.45 v1(54.45,15.45)
  BOTTOM w0.152: v1(54.45,15.45) 56.35,15.45 56.66,15.14 56.66,7.56 56.17,7.07 44.8,7.07 43.27,8.6 38.1,8.6 37.9,8.4 v1(36.55,8.4)
IMU_INT: length 28.5
  TOP w0.152: RN4.6 v1(43.52,16.47) ; AC1.12 29.2,15.47 29.2,15.8 29.4,16 30.85,16 31,15.85 31,14.5 31.38,14.12 32.5,14.12 ; U1.A2 34.05,13.35 33.8,13.6 33.02,13.6 32.5,14.12 ; 32.5,14.12 v1(32.5,14.1)
  TOP w0.203: R30.1 v1(48.3,17.85)
  IN1 w0.152: v1(48.3,17.85) 47,17.85 46.55,17.4 43.72,17.4 43.52,17.2 v1(43.52,16.47)
  BOTTOM w0.152: v1(32.5,14.1) 32.5,15.45 34.4,17.35 43.25,17.35 43.52,17.08 v1(43.52,16.47)
J8.1: length 6.3
  TOP w0.203: RN1.16 56.42,17.27 57.87,18.72 57.87,19.97 59.49,21.59 J8.1
J8.2: length 9.5
  TOP w0.203: RN1.15 56.9,15.95 57.1,16.16 57.1,17.25 58.25,18.4 58.25,19.7 58.85,20.3 60.84,20.3 62.13,21.59 62.13,21.59 J8.2
J8.3: length 5.3
  TOP w0.203: 59.56,19.03 57.6,17.07 57.6,15.95 57.1,15.45 RN1.14 ; 59.56,19.03 J8.3 ; 59.56,19.03 59.58,19.05
J8.4: length 8
  TOP w0.203: J8.4 60.8,17.75 58.95,17.75 58.05,16.85 58.05,15.75 57.25,14.95 RN1.13
J8.5: length 4
  TOP w0.152: J8.5 59.46,16.51
  TOP w0.203: 59.46,16.51 57.4,14.45 RN1.12
J8.6: length 6.7
  TOP w0.203: RN1.11 57.6,13.95 58.95,15.3 60.9,15.3 J8.6
J8.7: length 3.4
  TOP w0.152: J8.7 59.58,13.97 59.58,13.97
  TOP w0.203: 59.58,13.97 59.06,13.45 RN1.10
J8.8: length 6.3
  TOP w0.152: J8.8 62.13,13.97 62.13,13.97
  TOP w0.203: 62.13,13.97 60.81,12.65 58.45,12.65 58.28,12.82 RN1.9
J8.9: length 2.6
  TOP w0.152: 59.58,11.43 59.58,11.43 J8.9
  TOP w0.203: RN3.16 59.03,10.88 59.58,11.43
J8.10: length 5.4
  TOP w0.152: 62.13,11.43 62.13,11.43 J8.10
  TOP w0.203: 62.13,11.43 60.95,10.25 RN3.15
J8.11: length 2.7
  TOP w0.152: 59.58,8.89 59.58,8.89 J8.11
  TOP w0.203: 59.58,8.89 58.61,8.89 57.75,9.75 RN3.14
J8.12: length 6.1
  TOP w0.152: J8.12 62.13,8.89 62.13,8.89
  TOP w0.203: RN3.13 57.55,9.25 58.3,8.5 58.3,8.4 59,7.7 60.94,7.7 62.13,8.89
J8.13: length 3.5
  TOP w0.152: 59.58,6.35 59.58,6.35 J8.13
  TOP w0.203: RN3.12 57.5,8.75 57.95,8.3 57.95,8.25 59.58,6.62 59.58,6.35
J8.14: length 7.9
  TOP w0.152: J8.14 62.13,6.35 62.13,6.35
  TOP w0.203: RN3.11 57.45,8.25 57.95,7.75 57.95,5.65 58.45,5.15 60.93,5.15 62.13,6.35
LED_B: length 1.4
  TOP w0.203: IC5.6 25.7,12.07 R25.1
LED_G: length 3.6
  TOP w0.203: R24.2 27.06,15.39 27.35,15.1 27.35,13.65 27.95,13.05 28.39,13.05 IC5.3
LED_R: length 10.2
  TOP w0.203: IC4.6 26.73,9.58 v1(26.6,9.45) ; R26.2 26.5,17.88 v1(26.5,17.45)
  BOTTOM w0.203: v1(26.6,9.45) 26.6,11.35 25.6,12.35 25.6,13.45 26.6,14.45 26.6,17.35 v1(26.5,17.45)
PDM_CKO: length 48.9
  TOP w0.152: v1(54.5,15.85) 54.65,15.85 54.76,15.96 55,15.96 RN1.2
  TOP w0.203: v1(42.4,8.2) 42.4,11.2 42.9,11.7 42.9,14.1 43.05,14.25 45.6,14.25 45.8,14.05 45.8,13.05 45.4,12.65 45.08,12.65 U2.5
  IN2 w0.152: v1(35.25,10.74) 35.25,8.85 35.15,8.75 v1(35.15,8.25)
  BOTTOM w0.152: 42.35,8.2 42.21,8.06 37.75,8.06 37.74,8.06 35.34,8.06 v1(35.15,8.25) ; v1(54.5,15.85) 56.45,15.85 57,15.3 57,7.35 56.4,6.75 47.15,6.75 46.35,5.95 45.13,5.95 44.74,6.34 44.74,6.36 42.9,8.2 v1(42.4,8.2)
  BOTTOM w0.203: v1(42.4,8.2) 42.35,8.2
PDM_DATA: length 42.8
  TOP w0.152: v1(54.6,17.35) 54.6,17.2 55,16.8 RN1.1
  TOP w0.203: R28.1 44.22,6.63 44.8,6.05 v1(44.8,5.7)
  IN1 w0.152: v2(35.25,10.34) 35.25,8.8 35.1,8.65 v1(34.7,8.65)
  BOTTOM w0.152: 44.92,5.65 44.8,5.78 44.74,5.91 44.62,6.03 44.59,6.05 44.59,6.06 44.43,6.22 42.9,7.75 37.87,7.75 37.87,7.75 35.22,7.75 35.21,7.75 35.03,7.75 34.7,8.09 v1(34.7,8.65) ; 44.92,5.65 44.85,5.65 v1(44.8,5.7) ; 44.92,5.65 46.55,5.65 47.35,6.45 56.53,6.45 56.53,6.45 56.63,6.45 57.3,7.13 57.3,15.85 55.8,17.35 v1(54.6,17.35)
PG: length 27
  TOP w0.203: v1(7.9,19.65) 7.69,19.65 7.49,19.85 Q2.1 7.31,20.55 C5.1
  TOP w0.3: v1(20.95,12.3) 20.73,12.08 R1.1 20.42,11.63 20.65,11.4 IC1.8
  BOTTOM w0.203: v1(7.9,19.65) 8.75,19.65 9.1,19.3 9.1,17.75 9.6,17.25 9.6,11.25 10.45,10.4 20.4,10.4 20.95,10.95 v1(20.95,12.3)
Q_LED_B: length 24
  TOP w0.152: IC5.2 28.5,12.55 v1(29.1,12.55) ; v1(29.6,5.85) 29.8,5.65 33.55,5.65 34.6,4.6 37.35,4.6 37.85,5.1 37.85,10.9 37.61,11.14 U1.E8
  BOTTOM w0.152: v1(29.6,5.85) 29.55,5.9 29.55,9.3 28.9,9.95 28.9,12.35 v1(29.1,12.55)
Q_LED_G: length 22.5
  TOP w0.152: IC5.5 26.63,12.6 v1(26.1,12.6) ; U1.H7 36.05,9.65 36.28,9.42 36.9,8.8 v1(36.9,5.2)
  BOTTOM w0.152: v1(36.9,5.2) 36.9,5.05 36.69,4.85 36.11,4.85 36.1,4.84 30.5,4.84 30.49,4.85 30.32,4.85 30.32,4.85 30.2,4.85 29.96,5.1 29.17,5.1 29.17,5.1 29.15,5.1 27.5,6.75 27.5,8.3 27,8.8 27,11.7 v1(26.1,12.6)
Q_LED_R: length 13.3
  TOP w0.152: v1(29.1,8.95) 28.95,9.1 28.95,10.29 28.8,10.44 IC4.2
  IN1 w0.152: v1(29.1,8.95) 29.1,7.4 29.25,7.25 35.55,7.25 36.05,7.75 v2(36.05,10.34)
S3IO_2: length 17.3
  TOP w0.152: U1.A1 33.61,12.74 33.25,13.1 v1(31.75,13.1) ; v1(40.8,6.75) 40.8,6.08 RN2.14
  BOTTOM w0.152: v1(31.75,13.1) 31.68,13.03 31.68,12.5 31.68,11.64 32.1,11.22 32.1,10.45 32.55,10 32.55,7.43 32.6,7.39 32.6,7.37 33.13,6.84 39.69,6.84 39.73,6.8 40.75,6.8 v1(40.8,6.75)
S3IO_4: length 26.1
  TOP w0.152: v1(54.15,12.8) 54.98,12.8 RN1.8
  IN1 w0.152: v1(33.8,15.65) 33.55,15.4 33.55,13.81 33.55,13.1 34.05,12.6 v2(34.05,12.34)
  BOTTOM w0.152: v1(33.8,15.65) 33.93,15.78 35.77,15.78 36.17,15.38 36.36,15.38 36.49,15.25 49.9,15.25 52.35,12.8 v1(54.15,12.8)
S3IO_5: length 27.2
  TOP w0.152: v1(55.2,10.95) 55.27,10.88 RN3.1
  IN2 w0.152: v1(34.45,11.94) 34.45,12.9 34,13.35 34,14.95 v1(34.3,15.25)
  BOTTOM w0.152: v1(34.3,15.25) 34.52,15.47 35.58,15.47 35.98,15.07 36.23,15.07 36.4,14.91 49.7,14.91 49.71,14.9 49.78,14.9 49.78,14.9 49.8,14.9 53.75,10.95 v1(55.2,10.95)
S3IO_7: length 24.8
  TOP w0.152: RN3.3 55.45,9.75 55.45,9.75 v1(55.2,9.75) ; U1.A3 34.45,13.5 34.39,13.56 v1(34.39,14.09)
  BOTTOM w0.152: v1(34.39,14.09) 34.44,14.09 34.62,14.27 34.97,14.27 34.97,14.27 35.23,14.27 35.34,14.16 35.85,14.16 36.05,13.96 49.2,13.96 49.21,13.95 49.3,13.95 53.5,9.75 v1(55.2,9.75)
S3IO_8: length 29.8
  TOP w0.152: R14.2 33.36,15.09 33.9,14.55 34.75,14.55 35.1,14.2 v1(35.1,13.95) ; v1(55.2,9.2) 55.25,9.25 RN3.4
  BOTTOM w0.152: v1(34.85,11.95) 34.85,12.3 34.4,12.75 34.4,13.61 34.73,13.95 34.9,13.95 ; v1(35.1,13.95) 34.9,13.95 34.9,13.95 ; v1(55.2,9.2) 53.55,9.2 49.15,13.6 49.13,13.6 49.08,13.65 35.93,13.65 35.73,13.85 35.01,13.85 35,13.87 34.98,13.87 34.9,13.95
S3IO_9: length 29.2
  TOP w0.152: 32.08,16.85 32.25,16.68 v1(32.25,16.45)
  IN1 w0.152: v1(13.7,18.6) 13.75,18.55 14.75,18.55 15.7,17.6 17.32,17.6 17.32,17.6 21.62,17.6 23.61,15.6 28.5,15.6 29.35,16.45 v1(32.25,16.45) 34.1,16.45 35.05,15.5 35.05,14.55 34.75,14.25 34.75,13.95 34.5,13.7 34.5,13.1 34.85,12.75 v2(34.85,12.34)
  BOTTOM w0.152: v1(13.7,18.6) 13.7,18.95 14.3,19.55 14.3,20.2 TP3.1
S3IO_10: length 23.8
  TOP w0.152: v1(55.2,8.75) 55.73,8.75 55.73,8.75 55.85,8.75 RN3.5 ; U1.A4 34.85,13.55 v1(34.86,13.55)
  BOTTOM w0.152: v1(55.2,8.75) 53.55,8.75 48.95,13.35 35.8,13.35 35.6,13.55 34.87,13.55 v1(34.86,13.55)
S3IO_11: length 24.9
  TOP w0.152: v1(54.15,14) 54.2,13.95 RN1.6
  IN2 w0.152: v1(35.5,16.2) 35.57,16.13 35.57,13.12 35.38,12.93 35.38,12.93 35.25,12.8 v1(35.25,11.94)
  BOTTOM w0.152: v1(54.15,14) 54.1,13.95 52.25,13.95 50.4,15.8 50.33,15.8 50.28,15.85 50.26,15.85 50.25,15.86 36.83,15.86 36.44,16.25 35.55,16.25 v1(35.5,16.2)
S3IO_12: length 33
  TOP w0.152: RN1.7 54.95,13.4 v1(54.15,13.4)
  TOP w0.203: U2.3 46.78,10.18 v1(46.8,10.2)
  IN1 w0.152: v2(35.25,12.34) 35.25,12.8 35.36,12.91 35.36,12.91 36.25,13.8 v1(36.25,15.88)
  IN2 w0.152: v1(46.8,10.2) 48.45,10.2 51.65,13.4 v1(54.15,13.4)
  BOTTOM w0.152: v1(36.25,15.88) 36.38,15.75 36.4,15.75 36.47,15.68 36.49,15.68 36.61,15.55 50.13,15.55 50.13,15.55 50.15,15.55 52.3,13.4 v1(54.15,13.4)
S3IO_13: length 9.4
  TOP w0.152: RN2.15 v1(40.3,6.45)
  IN2 w0.152: v1(35.65,11.54) 35.95,11.54 36.1,11.39 36.1,9.25 36.35,9 37.45,9 37.75,8.7 37.75,6.9 38.2,6.45 v1(40.3,6.45)
S3IO_25: length 8.4
  TOP w0.152: RN2.16 v1(39.12,6.07)
  IN1 w0.152: v1(39.12,6.07) 37.28,6.07 37,6.35 37,9.7 37.32,10.02 37.32,10.38 36.96,10.74 v2(36.05,10.74)
S3IO_30: length 8.3
  TOP w0.152: v1(33.35,4.45) 33.3,4.45 32.9,4.85 32.37,4.85 R33.1
  IN2 w0.152: v1(33.6,8.05) 33.6,8.05 33.35,7.8 v1(33.35,4.45)
  BOTTOM w0.152: v1(34.85,10.74) 34.85,10.25 34.35,9.75 34.35,9.05 34.05,8.75 33.7,8.75 33.55,8.6 33.55,8.1 33.6,8.05 v1(33.6,8.05)
S3IO_35: length 60.4
  TOP w0.152: v1(32.5,10.5) 32.5,10.3 v1(31.3,9.1) ; v1(30.76,6.34) 30.82,6.4 31.3,6.4 ; v1(55.25,8.2) 55.8,8.2 RN3.6
  IN1 w0.152: v1(30.76,6.34) 20.81,6.34 20.45,6.7 13.05,6.7 10.95,4.6 v1(10.45,4.6) ; v2(34.05,10.74) 33.14,10.74 32.9,10.5 v1(32.5,10.5)
  BOTTOM w0.152: v1(10.45,4.6) 10.45,5.4 TP4.1 ; v1(30.76,6.34) 31.19,6.34 31.3,6.45 v1(31.3,9.1) ; v1(32.5,10.5) 32.5,11.1 33.05,11.65 33.05,13.35 34.35,14.65 35.37,14.65 35.56,14.46 35.98,14.46 36.14,14.3 49.45,14.3 53.6,10.15 55.45,10.15 55.7,9.9 55.7,8.35 55.55,8.2 v1(55.25,8.2)
SPI_MST_CLK: length 29.2
  TOP w0.152: RN2.13 v1(41.3,6.7) ; IC3.6 21.51,6.04 21.25,6.3 21.25,7.7 21.9,8.35 25.65,8.35 26.35,9.05 28.45,9.05 28.85,8.65 28.85,8.5 29.65,7.7 31.95,7.7 32.3,8.05 v1(32.9,8.05)
  BOTTOM w0.152: v1(34.45,10.74) 34.44,10.75 33.65,10.75 33.5,10.6 33.5,9.35 32.9,8.75 v1(32.9,8.05) 32.9,7.5 33.26,7.14 41.11,7.14 41.3,6.95 v1(41.3,6.7)
SPI_MST_CS2: length 29.4
  TOP w0.152: v1(27.2,17.65) 27.89,17.65 28.04,17.8 28.04,17.9 28.19,18.05 30.25,18.05 30.28,18.07 R38.2 ; U1.H5 35.25,9.55 36.15,8.65 36.15,6.5 36.49,6.16 v1(36.49,5.41)
  BOTTOM w0.152: v1(36.49,5.41) 36.49,5.39 36.25,5.15 35.98,5.15 35.98,5.15 30.62,5.15 30.62,5.15 30.45,5.15 30.2,5.4 29.3,5.4 28.7,6 28.7,9.6 27.68,10.63 27.68,13.35 27.42,13.6 27.42,14.13 27.2,14.35 v1(27.2,17.65)
SPI_MST_MISO: length 20.9
  TOP w0.152: U1.H3 34.45,9.2 34.3,9.05 34.3,8.8 v1(33.9,8.4) 33.45,8.4 33.25,8.2 33.25,7.1 33.1,6.95 29.9,6.95 27.71,4.76 26.82,4.76 ; v1(42.3,6.7) 42.3,6.7 RN2.11
  BOTTOM w0.152: v1(42.3,6.7) 42.3,7.05 41.9,7.45 38,7.45 38,7.45 35.09,7.45 35.09,7.45 34.91,7.45 33.96,8.4 v1(33.9,8.4)
SPI_MST_MOSI: length 34.2
  TOP w0.152: IC3.5 22.02,7.77 22.25,8 25.8,8 26.45,8.65 v1(28.15,8.65) ; RN2.12 v1(41.8,6.7)
  IN1 w0.152: 28.3,8.65 28.5,8.45 28.5,7.2 28.95,6.75 33.1,6.75 33.65,6.2 33.65,5.4 35.1,3.95 41.3,3.95 41.8,4.45 v1(41.8,6.7) ; 28.3,8.65 28.3,9.7 28.45,9.85 30.55,9.85 31.55,10.85 32.65,10.85 32.68,10.87 32.72,10.87 32.99,11.14 v2(34.05,11.14) ; 28.3,8.65 v1(28.15,8.65)
SPI_MST_SS: length 30.7
  TOP w0.152: U1.H2 34.05,9.4 v1(33.75,9.1) ; 26.82,3.5 26.87,3.55 v1(27.75,3.55)
  IN1 w0.152: v1(27.75,3.55) 27.35,3.95 12.15,3.95 11.68,3.48 v1(11.52,3.48)
  IN2 w0.152: v1(27.75,3.55) 31.6,3.55 32.3,4.25 32.3,8.4 32.55,8.65 33.15,8.65 33.6,9.1 v1(33.75,9.1)
  BOTTOM w0.152: v1(11.52,3.48) 10.88,3.48 10.42,3.02 TP7.1
SPI_SLV_CLK: length 10.9
  TOP w0.152: RN4.4 42.5,16.87 v1(42.5,16.4)
  IN1 w0.152: v1(42.5,16.4) 42.5,15.7 42.25,15.45 39.15,15.45 38.4,14.7 38.4,12.3 37.24,11.14 v2(36.05,11.14)
SPI_SLV_CSN: length 36.9
  TOP w0.152: v1(36.9,10.2) 36.76,10.34 U1.G8 ; v1(40.1,17) 40.78,17 RN4.1
  TOP w0.203: v1(63.62,18.08) R12.2 R10.1
  IN1 w0.152: v1(63.62,18.08) 63.28,18.08 62.95,17.75 56.3,17.75 55.9,18.15 51.55,18.15 51.1,18.6 50,18.6 41,18.6 40.1,17.7 v1(40.1,17)
  IN2 w0.152: v1(40.1,17) 39.85,16.75 39.6,16.75 37.2,14.35 37.2,11.85 36.9,11.55 v1(36.9,10.2)
SPI_SLV_MISO: length 10.1
  TOP w0.152: RN4.3 v1(42.02,16.53)
  IN1 w0.152: v1(42.02,16.53) 42.02,16.07 41.8,15.85 38.95,15.85 38.05,14.95 38.05,12.45 37.15,11.55 36.06,11.55 v2(36.05,11.54)
SPI_SLV_MOSI: length 43.6
  TOP w0.152: RN4.2 41.5,16.87 v1(41.5,16.4) ; v1(36.6,9.55) 36.6,9.79 U1.H8
  TOP w0.203: v1(63.48,4.92) R11.1 R13.2
  IN2 w0.152: v1(36.6,9.55) 36.62,9.53 36.83,9.53 37.03,9.73 37.03,9.78 37.3,10.05 37.35,10.05 ; 37.35,10.05 37.35,11.35 37.6,11.6 37.6,14.2 39.8,16.4 v1(41.5,16.4) ; 37.35,10.05 37.9,10.05 38.35,9.6 38.35,8.05 38.8,7.6 43.45,7.6 45.2,5.85 45.2,5.75 45.6,5.35 47.5,5.35 49.05,6.9 56.75,6.9 58.55,5.1 63.1,5.1 63.28,4.92 v1(63.48,4.92)
SWD_CLK: length 39.5
  TOP w0.152: U1.A5 35.25,13.21 v1(35.23,13.23)
  TOP w0.203: v1(51.15,5.65) 51.15,7.3 50.9,7.55 49.68,7.55 J7.4 49.52,7.55 48.14,7.55 47.65,8.04 v1(47.65,8.15) 47.45,8.15 47.36,8.24 R34.1 46.69,8.23 D4.2
  BOTTOM w0.152: v1(47.65,8.15) 47.65,9.55 47.5,9.7 46.15,9.7 45.85,10 44.4,10 43.1,11.3 42.35,11.3 41.75,10.7 37.95,10.7 36.35,12.3 35.55,12.3 35.23,12.62 v1(35.23,13.23) ; TP6.1 65.09,3.74
  BOTTOM w0.203: TP6.1 64.54,4.25 63.45,4.25 62.65,5.05 56.85,5.05 55.85,6.05 51.55,6.05 v1(51.15,5.65)
SWD_IO: length 40.2
  TOP w0.203: v1(65.55,1.55) 63.8,1.55 62.85,2.5 58.3,2.5 58.05,2.75 58.05,4.25 56.9,5.4 54.25,5.4 53.7,4.85 49.9,4.85 49.55,5.2 49.55,6.31 J7.2 46.75,6.36 D4.1 ; D4.1 46.66,6.45 v1(46.1,6.45) ; D4.1 46.68,6.43 R35.1
  IN2 w0.152: v1(45.3,9.6) 45.3,9.5 44.75,8.95 44.75,7.8 v1(46.1,6.45)
  BOTTOM w0.152: v1(65.55,1.55) 65.2,1.2 TP5.1 ; v1(35.65,11.94) 36.21,11.94 37.85,10.3 43.6,10.3 44.3,9.6 v1(45.3,9.6)
SYS_RST: length 67.2
  TOP w0.152: J7.10 49.59,11.45 48.05,11.45 ; D3.2 47.92,13.12 47.75,12.95 47.75,11.75 48.05,11.45 ; v1(47.2,9.25) 47.3,9.25 47.8,9.75 47.8,11.2 48.05,11.45 ; U1.F8 37.16,10.74 37.35,10.55 v1(37.35,9.45) ; S2.3 18.3,5.1 v1(19.1,5.1)
  TOP w0.254: 13.05,5.34 13.05,4.4 12.65,4 12.65,2.8 13.84,1.61 J6.16 ; 13.05,5.34 R22.1 ; 13.05,5.34 13.31,5.08 S2.4
  TOP w0.505: S2.4 S2.3
  IN1 w0.152: v1(19.1,5.1) 19.4,5.4 27.35,5.4 29.2,3.55 43.1,3.55 43.4,3.85 43.4,7.2 43.15,7.45 37.5,7.45 37.35,7.6 v1(37.35,9.45)
  BOTTOM w0.152: v1(37.35,9.45) 37.48,9.45 37.59,9.56 43.61,9.56 44.57,8.6 46.55,8.6 v1(47.2,9.25)
USB_D_N: length 27.2
  TOP w0.127: J5.B7 8.5,12.17 ; 8.5,12.17 8.35,12.02 8.35,11.25 8.27,11.17 J5.A7 ; 8.5,12.17 9.79,12.17 D2.2 10.36,11.6 11.9,11.6 v1(12,11.7) ; v1(29.4,10.65) 29.52,10.65 29.57,10.6 29.93,10.6 30.05,10.73 R17.2 R16.2
  IN2 w0.152: v1(12,11.7) 12.1,11.6 14.7,11.6 15.65,10.65 v1(29.4,10.65)
USB_D_P: length 28.1
  TOP w0.127: v1(29.4,10.25) 29.5,10.25 29.55,10.3 29.93,10.3 30.05,10.17 R19.2 R18.2 ; J5.A6 6.62,11.67 6.4,11.45 6.4,10.8 6.55,10.65 7.34,10.65 J5.B6 8.33,10.67 8.45,10.55 9.63,10.55 D2.1 10.38,11.3 11.9,11.3 v1(12,11.2)
  IN2 w0.152: v1(12,11.2) 12.05,11.25 14.55,11.25 15.55,10.25 v1(29.4,10.25)
USR_BUTTON: length 55.2
  TOP w0.152: S1.3 18.31,8.75 v1(19.2,8.75) ; v1(55.2,10.5) 55.45,10.25 RN3.2
  TOP w0.3: S1.4 13.93,8.78 12.91,7.76 R23.1
  TOP w0.505: S1.4 S1.3
  IN1 w0.152: v1(19.2,8.75) 19.35,8.75 19.95,9.35 23.05,9.35 23.5,9.8 23.5,14.35 24.45,15.3 28.7,15.3 29.5,16.1 33.95,16.1 34.65,15.4 v1(34.65,15.05) 34.65,15 33.9,14.25 33.9,13.25 34.45,12.7 v2(34.45,12.34)
  BOTTOM w0.152: v1(55.2,10.5) 53.75,10.5 49.65,14.6 49.58,14.6 49.58,14.6 36.27,14.6 36.11,14.77 35.68,14.77 35.4,15.05 v1(34.65,15.05)
N2984124: length 1.8
  TOP w0.3: IC1.6 21.27,10.18 21.85,9.6 L1.1
N2984508: length 4.2
  TOP w0.3: R2.1 16.55,10.98 C2.2 16.61,11.02 R4.2 18.18,11.02 18.24,10.96 18.28,10.96 18.57,10.68 IC1.2
N2984777: length 2.6
  TOP w0.203: R9.1 8.38,17.17 7.7,17.85 7.04,17.85 6.84,18.05 Q2.3
N2984894: length 1.9
  TOP w0.3: R9.2 11.19,16.94 IC2.5
N2985185: length 7.3
  TOP w0.203: v1(10.25,18) 9.15,18 R8.1
  TOP w0.3: v1(10.25,13.5) 10.87,13.5 11.2,13.83 IC2.1
  BOTTOM w0.3: v1(10.25,13.5) v1(10.25,18)
N2985197: length 1.4
  TOP w0.203: LED1.1 9.13,18.9 R8.2
N2985457: length 2.4
  TOP w0.3: 13.63,9.95 R3.1 ; 13.63,9.95 Q1.6 ; 13.63,9.95 13.13,9.45 Q1.5
N2985636: length 1.3
  TOP w0.3: R5.2 11.2,7.77 11.2,8.5 10.97,8.73 Q1.3
N2988172: length 2.1
  TOP w0.152: 26.82,6.04 27.49,6.04 28.1,6.65 28.68,6.65 R21.1
N2988191: length 2
  TOP w0.3: IC3.7 21.44,4.76 20.82,5.38 R20.1
N3049346: length 5.8
  TOP w0.152: Y2.1 39.48,10.97 38.51,11.94 U1.C8
  TOP w0.254: Y2.1 40.1,10.83 C12.1
N3049374: length 5.9
  TOP w0.152: U1.B8 38.34,12.34 39.47,13.47 Y2.2
  TOP w0.254: C13.1 40.05,13.56 Y2.2
N3056718: length 2.7
  TOP w0.3: R10.2 66.9,20.42 J2.2
N3056722: length 2.8
  TOP w0.3: J3.2 67,5.81 R11.2
N3059207: length 3.5
  TOP w0.152: v1(31.55,10.15) 31.55,9.9 31.4,9.75 30.94,9.75 R19.1
  IN1 w0.152: v2(34.05,10.34) 33.19,10.34 33,10.15 v1(31.55,10.15)
N3059301: length 3.6
  TOP w0.152: v1(32.11,11.73) 32.1,11.74 31.86,11.74 31.15,12.45 30.95,12.45 R16.1
  IN1 w0.152: v2(34.05,11.54) 32.99,11.54 32.9,11.45 32.3,11.45 32.15,11.6 32.15,11.7 v1(32.11,11.73)
N3059461: length 2.9
  TOP w0.152: R17.1 31.26,10.85 33,10.85 33.11,10.74 U1.F1
N3059478: length 3.6
  TOP w0.152: U1.H1 33.65,9.5 32.8,8.65 31.85,8.65 31.56,8.36 R18.1
N3059975: length 29.2
  TOP w0.152: C8.1 38.34,17.11 38.5,16.95 v1(38.5,16.8)
  IN1 w0.152: v2(36.05,12.33) 36.06,12.34 36.89,12.34 37.25,12.7 37.25,15.25 38.5,16.5 v1(38.5,16.8) 38,17.3 29.15,17.3 28.1,16.25 23.85,16.25 21.8,18.3 20.5,18.3 20.05,18.75 v1(20.05,20.3)
  BOTTOM w0.152: TP1.1 19.41,20.3 v1(20.05,20.3)
N3059993: length 29.6
  TOP w0.152: v1(37,16.7) 36.77,16.7 C9.1
  IN1 w0.152: v1(17.5,20.25) 17.5,18.05 17.65,17.9 21.75,17.9 23.74,15.91 28.26,15.91 29.3,16.95 35.55,16.95 35.8,16.7 v1(37,16.7) 36.9,16.6 36.9,14.02 35.73,12.85 35.73,12.83 35.65,12.75 v2(35.65,12.34)
  BOTTOM w0.152: TP2.1 16.82,20.25 v1(17.5,20.25)
N3061302: length 4.8
  TOP w0.203: R24.1 26.66,16.64 26.25,17.05 24,17.05 23.65,17.4 23.65,18.48 23.68,18.5
N3061308: length 1.8
  TOP w0.203: R26.1 26.64,18.9 26.05,18.9 25.65,18.5 LED2.1
N3064576: length 2.1
  TOP w0.203: U2.1 43.33,10.02 R28.2
N3067899: length 5.5
  TOP w0.203: R32.2 29.24,3.97 J6.11
N3067935: length 5.4
  TOP w0.203: J6.10 29.08,2.43 29.9,3.25 32.15,3.25 32.35,3.45 R33.2
N3068086: length 9.6
  TOP w0.203: RN2.1 39.67,4.37 39.35,4.05 34.4,4.05 J6.9
N3068088: length 7.9
  TOP w0.203: RN2.2 40.3,4.1 39.7,3.5 36.39,3.5 J6.8
N3068090: length 6
  TOP w0.203: J6.7 38.38,2.95 39.95,2.95 40.8,3.8 RN2.3
N3068092: length 4.2
  TOP w0.203: J6.6 41.3,3.33 RN2.4
N3068094: length 3.4
  TOP w0.203: J6.5 41.8,1.29 RN2.5
N3068096: length 4.2
  TOP w0.203: RN2.6 42.3,3.29 J6.4
N3068098: length 5.9
  TOP w0.203: RN2.7 42.8,3.85 43.5,3.15 44.98,3.15 J6.3
N3068100: length 7.7
  TOP w0.203: J6.2 47.02,3.65 43.9,3.65 43.43,4.12 RN2.8
N3070123: length 9
  TOP w0.203: J9.12 49.46,19.1 44.9,19.1 44.65,18.85 RN4.9
N3070397: length 3
  TOP w0.203: J9.4 30.8,20.76 R38.1
N3070527: length 8.3
  TOP w0.203: J9.5 36.01,19.75 39.85,19.75 40.89,18.71 RN4.16
N3070529: length 7.9
  TOP w0.203: J9.11 49.41,20.21 48.8,19.6 44.7,19.6 44.02,18.92 RN4.10
N3070531: length 5.9
  TOP w0.203: RN4.11 43.52,19.12 44.5,20.1 46.65,20.1 46.87,20.32 J9.10
N3070533: length 3.8
  TOP w0.203: J9.9 43.02,20.28 RN4.12
N3070535: length 3.6
  TOP w0.203: J9.8 42.52,20.86 RN4.13
N3070537: length 4.5
  TOP w0.203: J9.7 39.41,21.59 42.02,18.98 RN4.14
N3070539: length 6.4
  TOP w0.203: RN4.15 41.52,18.78 40.1,20.2 38.1,20.2 J9.6
N3103817: length 2.8
  TOP w0.203: 23.68,15.1 23.68,14.68 24.6,13.75 24.9,13.75 R25.2
N3119865: length 3
  TOP w0.254: R36.1 27.55,19.6 26.55,20.6 J9.2

## Copper pours and planes (outline as drawn; the poured copper is in the pictures)
+3V3 on PWR: 67.33,0.5 11.35,0.5 11.2,0.65 11.2,10.85 22.85,10.85 23,11 23,17.25 25.35,17.25 25.35,17.3 25.45,17.2 31.7,17.2 31.7,22.3 31.76,22.36 67.27,22.36 67.49,22.35 67.68,22.33 67.89,22.28 68.1,22.2 68.29,22.11 68.48,22 68.64,21.87 68.78,21.73 68.95,21.53 69.05,21.39 69.14,21.23 69.19,21.11 69.29,20.8 69.33,20.6 69.34,20.47 69.35,20.3 69.37,2.55 69.36,2.37 69.34,2.17 69.28,1.97 69.23,1.82 69.16,1.64 69.1,1.54 69.01,1.39 68.88,1.23 68.7,1.04 68.52,0.89 68.21,0.71 68.01,0.62 67.82,0.56 67.6,0.52
+VBAT on TOP (solid shape): 21.7,16.8 21.7,15.25 21.69,15.24 21.69,13.56 21.7,13.54 21.7,12.96 21.69,12.94 21.64,12.89 21.63,12.89 21.27,12.89 21.22,12.83 19.37,12.83 19.35,12.85 19.25,12.85 18.6,12.2 18.5,12.2 18.2,11.9 14.76,11.9 14.25,11.39 14.23,11.39 14.23,11.38 14.06,11.21 14.05,11.19 14.05,10.95 14.04,10.93 14.03,10.92 13.55,10.92 13.14,10.51 12.31,10.51 12.1,10.3 12.1,9.25 12.35,9 12.85,9 12.85,8.65 12.75,8.55 11.85,8.55 11.65,8.75 11.65,10.35 12.1,10.8 12.15,10.8 13.2,11.85 13.2,13.04 13.19,13.06 13.05,13.2 13.04,13.22 13.04,13.6 13.03,13.62 13.02,13.63 12.88,13.63 12.86,13.63 12.85,13.65 12.85,15.07 12.86,15.09 12.88,15.1 13.5,15.1 15.53,13.07 15.88,13.07 15.9,13.05 17.69,13.05 17.72,13.08 17.83,13.08 18.5,13.75 18.5,16.9 18.95,17.35 21.15,17.35
+VBAT on BOTTOM: 18.65,19.15 20.2,19.15 22.4,21.35 22.4,22.25 22.7,22.55 24.9,22.55 24.95,22.5 24.95,14.8 23.62,13.47 19.07,13.47 18.27,12.68 18.27,12.43 17.45,11.6 16.35,11.6 16,11.95 16,12.85 17.9,14.75 17.9,18.4
+VBUS on TOP: 20.35,10.55 21.35,10.55 22.05,11.25 22.3,11.25 22.3,12.1 22.9,12.7 24,12.7 24.15,12.85 24.15,13.5 24.1,13.55 22.45,13.55 22.2,13.3 22.2,12.95 21.45,12.2 21.45,11.05 21.2,10.8 20.3,10.8 20.3,10.6
+VBUS on PWR: 10.4,0.5 2.51,0.5 1.1,1.1 0.5,2.51 0.5,5.67 1,6.17 0.99,16.76 0.5,17.25 0.5,20.39 1.13,21.78 2.53,22.36 30.54,22.36 30.6,22.3 30.6,18.4 22.3,18.4 22.3,11.4 10.4,11.4
GND on TOP (solid shape): 17.55,17.2 17.55,13.7 17.45,13.6 15.65,13.6 14.55,14.7 14.55,17.1 15.2,17.75 17,17.75
GND on BOTTOM: 67.33,0.5 2.51,0.5 1.1,1.1 0.5,2.51 0.5,5.67 1,6.17 0.99,16.76 0.5,17.25 0.5,20.39 1.13,21.78 2.53,22.36 67.27,22.36 67.49,22.35 67.68,22.33 67.89,22.28 68.1,22.2 68.29,22.11 68.48,22 68.64,21.87 68.78,21.73 68.95,21.53 69.05,21.39 69.14,21.23 69.19,21.11 69.29,20.8 69.33,20.6 69.34,20.47 69.35,20.3 69.37,2.55 69.36,2.37 69.34,2.17 69.28,1.97 69.23,1.82 69.16,1.64 69.1,1.54 69.01,1.39 68.88,1.23 68.7,1.04 68.52,0.89 68.21,0.71 68.01,0.62 67.82,0.56 67.6,0.52 ; 15 cut-outs
GND on GND: 67.33,0.5 2.51,0.5 1.1,1.1 0.5,2.51 0.5,5.67 1,6.17 0.99,16.76 0.5,17.25 0.5,20.39 1.13,21.78 2.53,22.36 67.27,22.36 67.49,22.35 67.68,22.33 67.89,22.28 68.1,22.2 68.29,22.11 68.48,22 68.64,21.87 68.78,21.73 68.95,21.53 69.05,21.39 69.14,21.23 69.19,21.11 69.29,20.8 69.33,20.6 69.34,20.47 69.35,20.3 69.37,2.55 69.36,2.37 69.34,2.17 69.28,1.97 69.23,1.82 69.16,1.64 69.1,1.54 69.01,1.39 68.88,1.23 68.7,1.04 68.52,0.89 68.21,0.71 68.01,0.62 67.82,0.56 67.6,0.52 ; 1 cut-out
GND on IN2: 67.33,0.5 2.51,0.5 1.1,1.1 0.5,2.51 0.5,5.67 1,6.17 0.99,16.76 0.5,17.25 0.5,20.39 1.13,21.78 2.53,22.36 67.27,22.36 67.49,22.35 67.68,22.33 67.89,22.28 68.1,22.2 68.29,22.11 68.48,22 68.64,21.87 68.78,21.73 68.95,21.53 69.05,21.39 69.14,21.23 69.19,21.11 69.29,20.8 69.33,20.6 69.34,20.47 69.35,20.3 69.37,2.55 69.36,2.37 69.34,2.17 69.28,1.97 69.23,1.82 69.16,1.64 69.1,1.54 69.01,1.39 68.88,1.23 68.7,1.04 68.52,0.89 68.21,0.71 68.01,0.62 67.82,0.56 67.6,0.52 ; 5 cut-outs
PG on TOP (solid shape): 21.15,12.35 21.15,11.7 21,11.55 21,11.25 20.3,11.25 20.3,11.5 20.25,11.55 20.25,12.3 20.35,12.4 21.1,12.4
N2984124 on TOP (solid shape): 22.49,10.5 22.51,10.49 22.59,10.41 22.6,10.39 22.6,8.76 22.57,8.73 21.82,8.73 21.8,8.75 21.55,8.75 21.41,8.89 21.4,8.91 21.4,9.84 21.39,9.86 21.3,9.95 21.3,10 21.15,10.15 20.8,10.15 20.8,10.2 21.45,10.2 21.75,10.5

## Text on the board
BOTTOM: BOTTOM LAYER
